# Altium PCB ECS_V1.06.PcbDoc
Units mil, origin at the board's own origin, x right, y up, seen from the top; angles counter-clockwise.
Board outline 5681.51 x 6024.45 mil, 2 copper layers (Component Side, Bottom Layer), stack 12.8 mil thick; 110 components, 106 nets, 425 pads, 494 vias.
Unrouted connection lines stored in the file: 1.
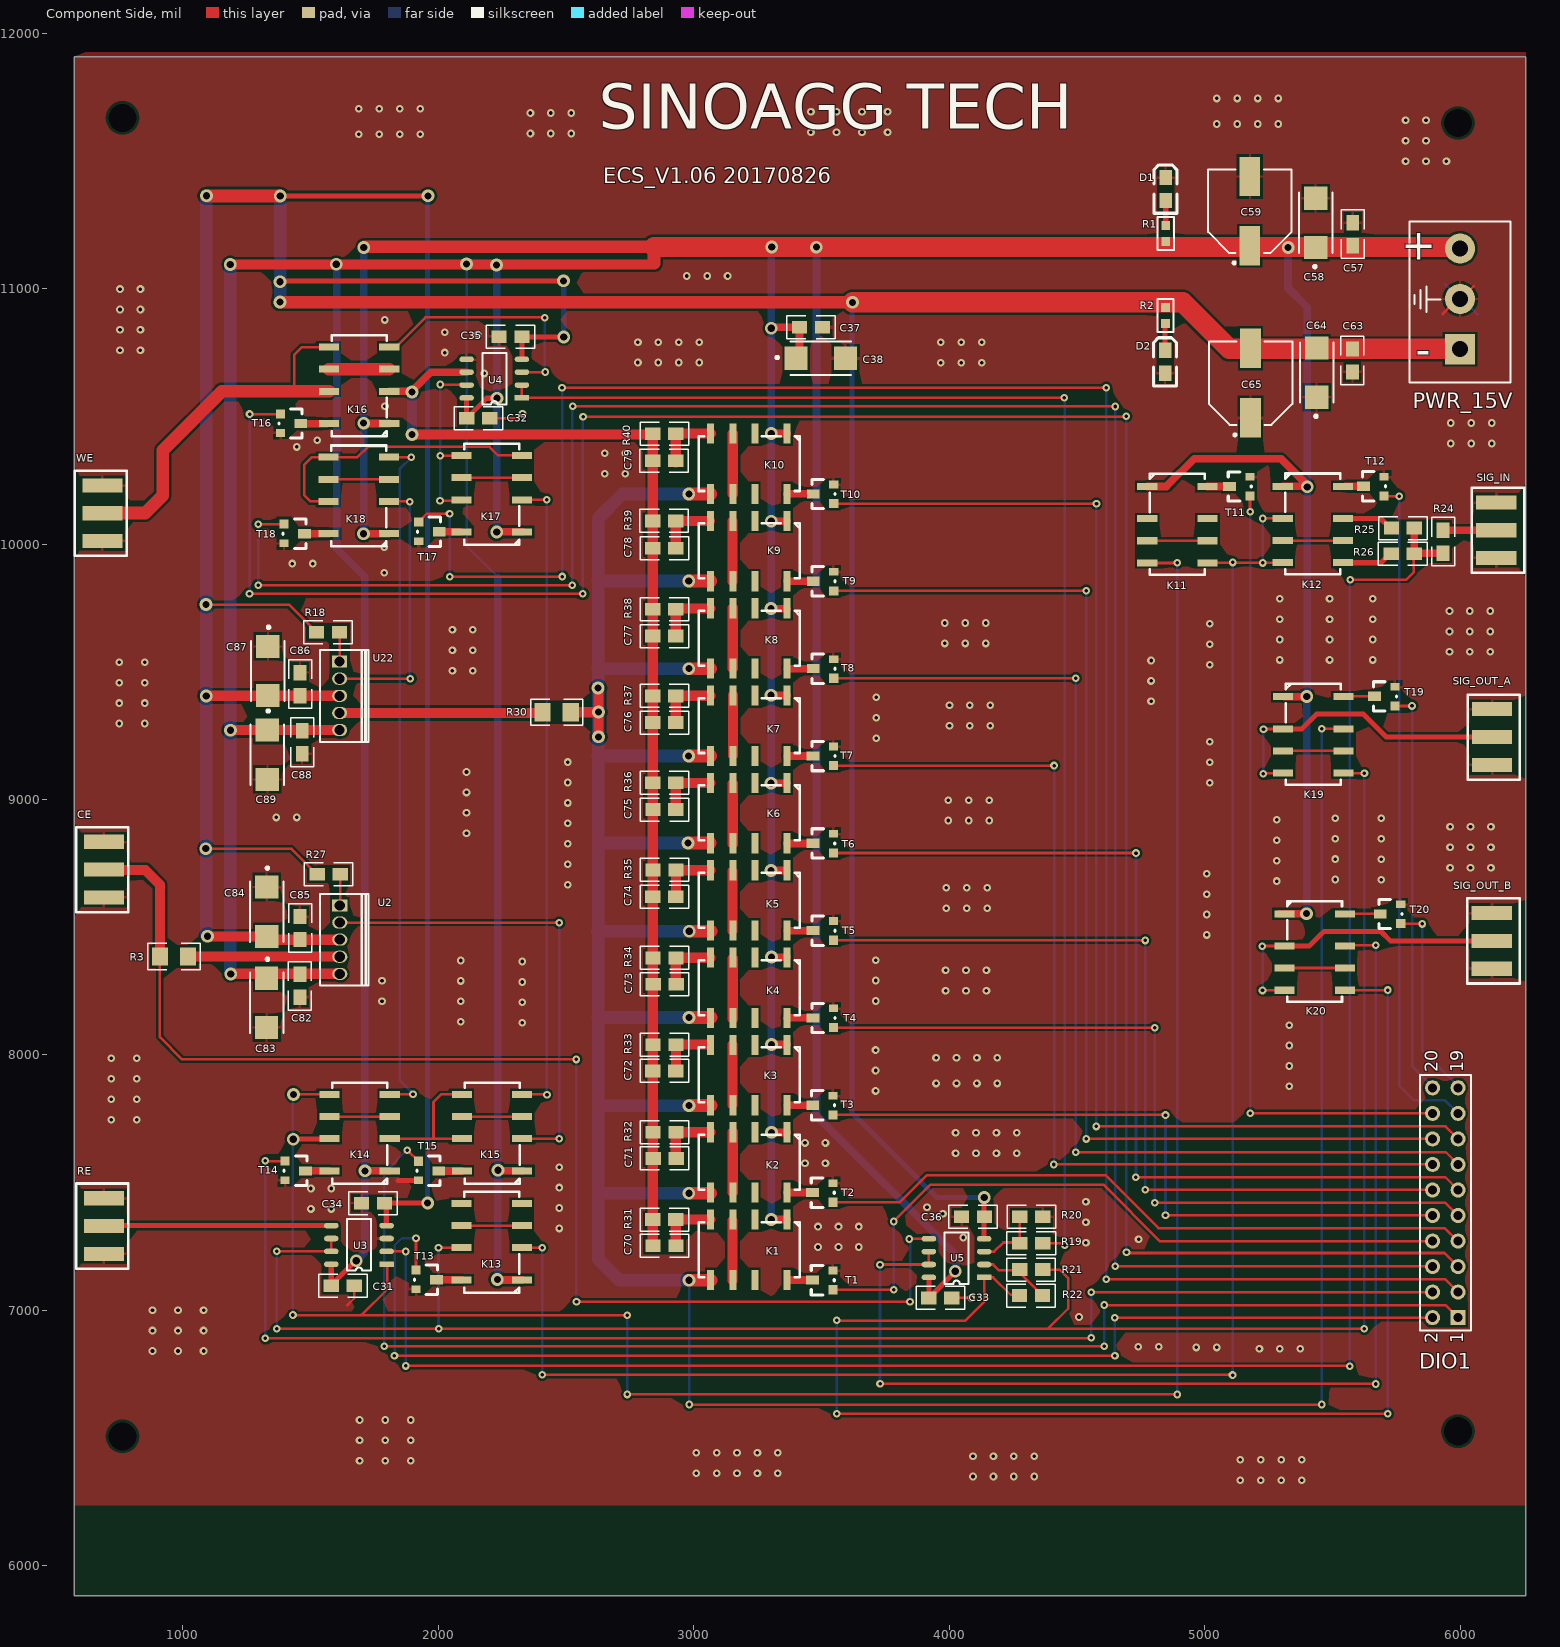
[diagram p0: Component Side view]
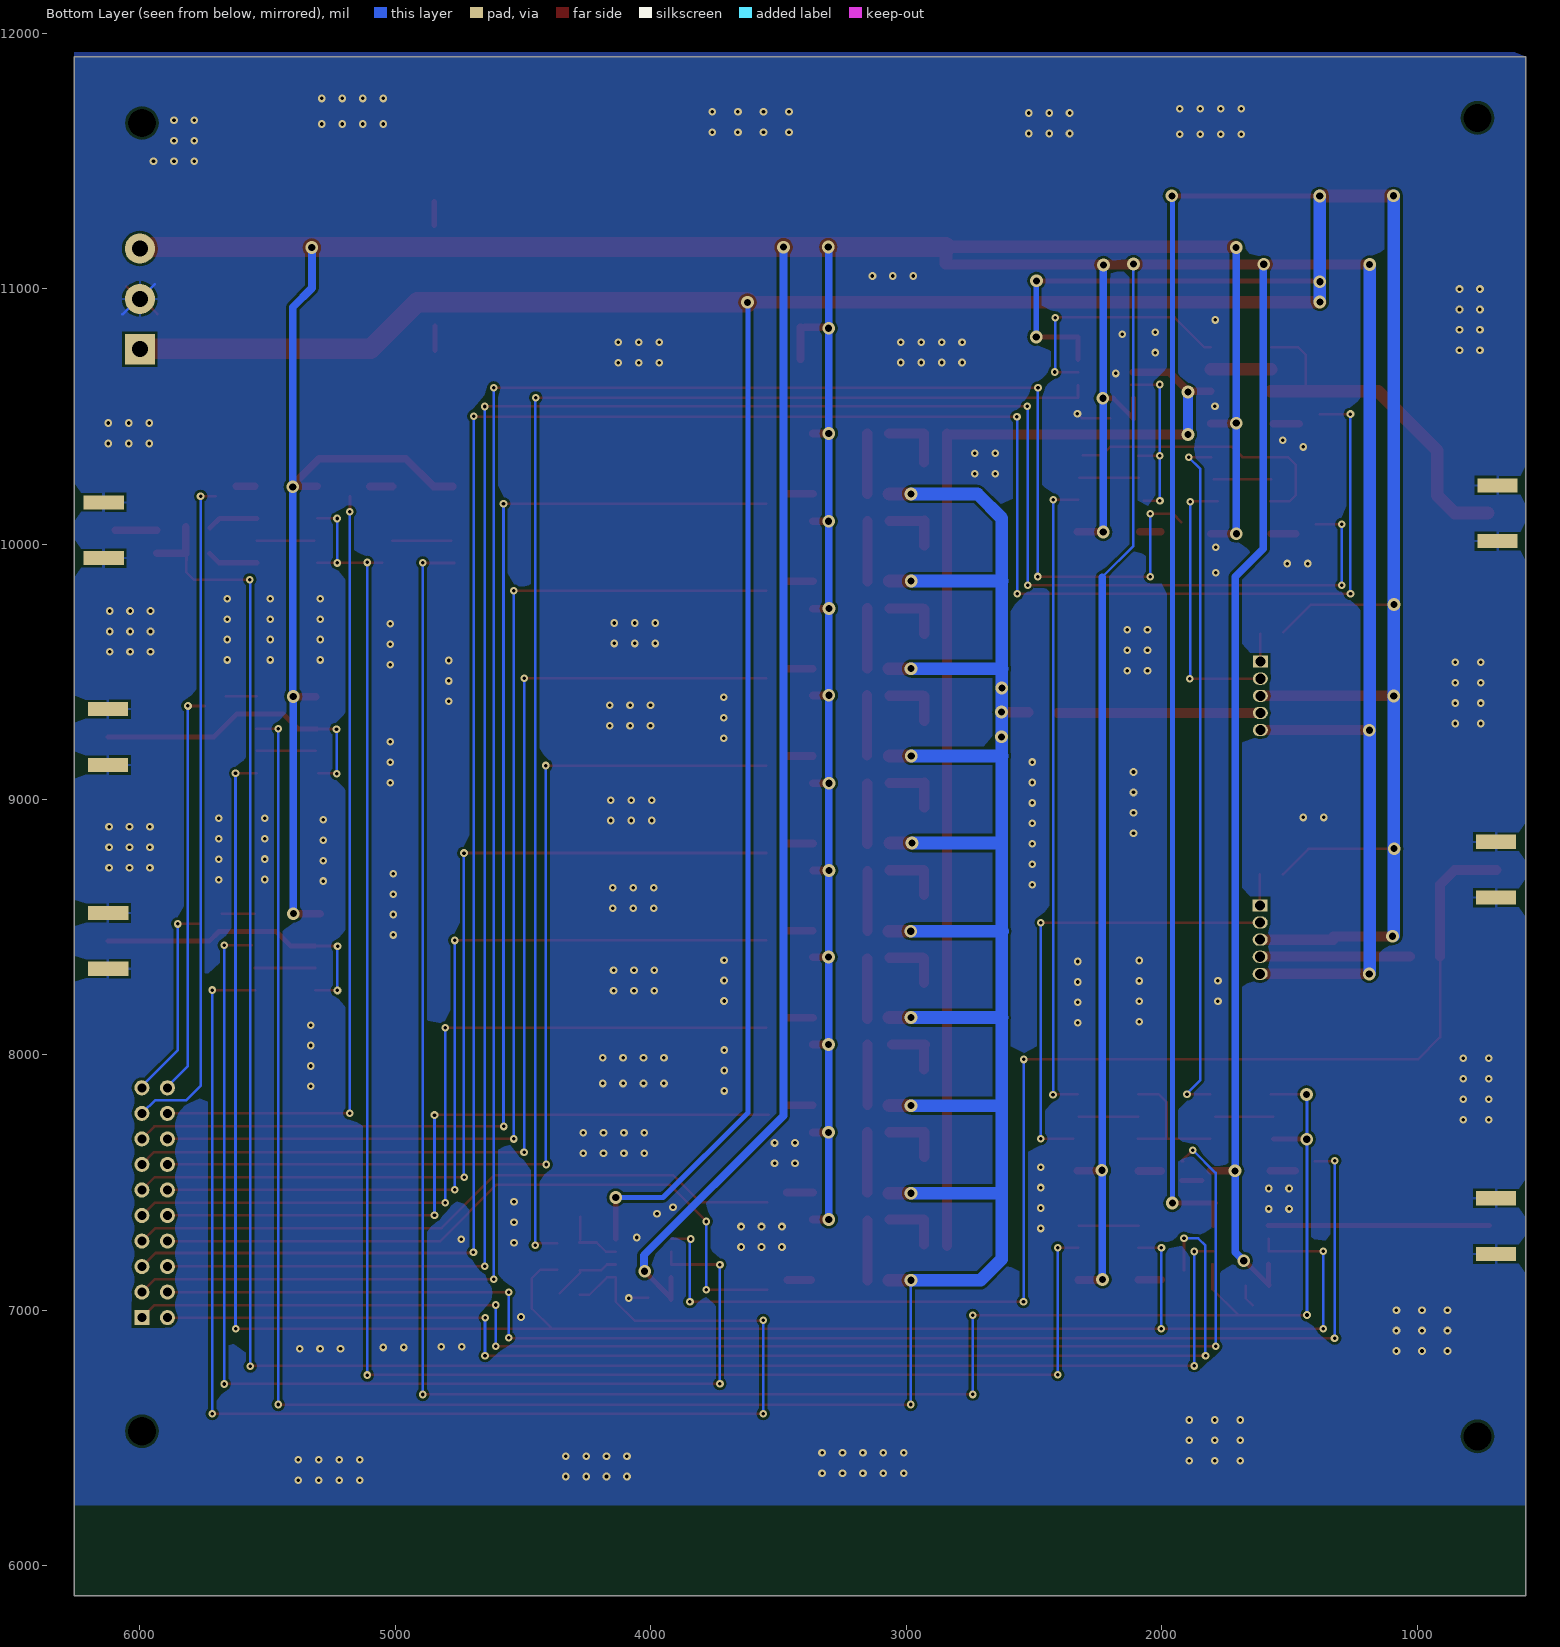
[diagram p1: Bottom Layer view, seen from below]

## Layer stack, top to bottom
Top Solder: solder mask 0.4, Solder Resist, Dk 3.5
Component Side: signal copper 1.4
Dielectric 1: core 10, FR-4, Dk 4.2
Bottom Layer: signal copper 1.4
Solder Side: solder mask 0.4, Solder Resist, Dk 3.5

## Board outline
575.03,5883.03 575.03,11907.48 6256.54,11907.48 6256.54,5883.03

## Design rules (kind name [scope] priority, off if disabled: settings)
Clearance [All] p1: gap=5
ComponentClearance [All] p1: gap=0 collisioncheckmode=3 verticalgap=0 showdistances=FALSE
PolygonConnect PolygonConnect_1 [IsVia] p1: connectstyle=Direct reliefconductorwidth=10 reliefentries=4 polygonreliefangle="90 Angle" airgapwidth=10
PolygonConnect PolygonConnect_2 [All] p2: connectstyle=Relief reliefconductorwidth=10 reliefentries=4 polygonreliefangle="90 Angle" airgapwidth=10
RoutingVias [All] p1: holewidth=28 width=50 viastyle="Through Hole" minholewidth=28 minwidth=50 maxholewidth=28 maxwidth=50
SolderMaskExpansion [All] p1: expansion=4
Width [All] p1: maxlimit=100 minlimit=10 preferedwidth=10 minimp=50.000000 maximp=50.000000 favimp=50.000000
29 further rules are at their usual default settings.

## Components (designator, comment, footprint, x,y, rotation, side; value= is the part's Value field where it differs from the comment)
C31 "100nF" 0805 1581.12,7096.82 r0 top
C32 "100nF" 0805 2111.62,10492.81 r0 top
C33 "100nF" 0805 3920.34,7048.66 r0 top
C34 "100nF" 0805 1789.33,7419.73 r180 top
C35 "100nF" 0805 2327.67,10811.61 r180 top
C36 "100nF" 0805 4138.47,7366.24 r180 top
C37 "Cap" 0805 3413.98,10848.52 r0 top
C38 "Cap Pol1" 6032_pol 3496.36,10727.17 r0 top
C57 "100nF" 0805 5579.83,11167.9 r90 top
C58 "10uF,50V" 6032_pol 5434.67,11256.17 r90 top
C59 "47uF,50V" cap_pol_8*10.2 5176.68,11303.03 r90 top
C63 "100nF" 0805 5578.46,10673.58 r90 top
C64 "10uF,50V" 6032_pol 5438.7,10670.2 r90 top
C65 "47uF,50V" cap_pol_8*10.2 5179.65,10629.85 r90 top
C70 "Cap" 0805 2930.28,7252.96 r180 top
C71 "Cap" 0805 2930.95,7594.95 r180 top
C72 "Cap" 0805 2930.17,7937.44 r180 top
C73 "Cap" 0805 2930.97,8276.79 r180 top
C74 "Cap" 0805 2929.98,8619.37 r180 top
C75 "Cap" 0805 2930.23,8960.45 r180 top
C76 "Cap" 0805 2929.87,9301.35 r180 top
C77 "Cap" 0805 2929.65,9639.67 r180 top
C78 "Cap" 0805 2929.87,9983.9 r180 top
C79 "Cap" 0805 2929.36,10326.44 r180 top
C82 "100nF" 0805 1458.4,8315.76 r270 top
C83 "10uF" 6032_pol 1328.23,8204.64 r270 top
C84 "100nF" 0805 1458.9,8542.08 r270 top
C85 "10uF" 6032_pol 1328.3,8561.56 r270 top
C86 "100nF" 0805 1458.9,9496.72 r270 top
C87 "10uF" 6032_pol 1332.6,9504.06 r270 top
C88 "100nF" 0805 1467.13,9269.02 r270 top
C89 "10uF" 6032_pol 1330.75,9176.3 r270 top
CE "SMA" SMA_SMT 691.1,8728.92 r90 top
D1 "LED3" 0805_pol1 4836.58,11385.74 r270 top
D2 "LED3" 0805_pol1 4834.49,10709.03 r270 top
DIO1 "Header 10X2" HDR2X10 5992.27,6971.47 r90 top
K1 "AXICOM IM" AXICOM_IM06 3240.5,7230.66 r180 top
K2 "AXICOM IM" AXICOM_IM06 3240.5,7572.54 r180 top
K3 "AXICOM IM" AXICOM_IM06 3240.5,7914.42 r180 top
K4 "AXICOM IM" AXICOM_IM06 3240.5,8256.31 r180 top
K5 "AXICOM IM" AXICOM_IM06 3240.5,8598.19 r180 top
K6 "AXICOM IM" AXICOM_IM06 3240.5,8940.07 r180 top
K7 "AXICOM IM" AXICOM_IM06 3240.5,9281.95 r180 top
K8 "AXICOM IM" AXICOM_IM06 3240.5,9623.83 r180 top
K9 "AXICOM IM" AXICOM_IM06 3240.5,9965.71 r180 top
K10 "AXICOM IM" AXICOM_IM06 3240.5,10307.59 r180 top
K11 "AXICOM IM" AXICOM_IM06 4900.09,10100.44 r270 top
K12 "AXICOM IM" AXICOM_IM06 5430.85,10101.09 r270 top
K13 "AXICOM IM" AXICOM_IM06 2202.11,7244.4 r90 top
K14 "AXICOM IM" AXICOM_IM06 1685.03,7671.14 r90 top
K15 "AXICOM IM" AXICOM_IM06 2203.38,7671.14 r90 top
K16 "AXICOM IM" AXICOM_IM06 1682.97,10596.78 r90 top
K17 "AXICOM IM" AXICOM_IM06 2202.13,10171.99 r90 top
K18 "AXICOM IM" AXICOM_IM06 1681.76,10165.66 r90 top
K19 "AXICOM IM" AXICOM_IM06 5432.18,9277.65 r270 top
K20 "AXICOM IM" AXICOM_IM06 5437.68,8427.53 r270 top
PWR_15V "Header 3" PWR_3T 6000.11,10762.79 r180 top
R1 "10K" 0603 4843.39,11276.36 r0 top
R2 "2.2K" 0603 4841.73,10956.12 r0 top
R3 "Res1" 1206 1020.47,8385.31 r180 top
R18 "Res1" 0805 1613.51,9654.91 r180 top
R19 "Res1" 0805 4276.15,7262.69 r0 top
R20 "Res1" 0805 4276.76,7366.72 r0 top
R21 "Res1" 0805 4365.88,7159.69 r180 top
R22 "Res1" 0805 4365.29,7057.83 r180 top
R24 "Res1" 0805 5933.37,9964.28 r90 top
R25 "Res1" 0805 5821.13,10062.63 r180 top
R26 "Res1" 0805 5820.42,9962.33 r180 top
R27 "Res1" 0805 1615.64,8706.92 r180 top
R30 "Res1" 1206 2408.46,9341.59 r0 top
R31 "Res1" 0805 2929.95,7355.55 r180 top
R32 "Res1" 0805 2930.46,7697.25 r180 top
R33 "Res1" 0805 2930.52,8040.26 r180 top
R34 "Res1" 0805 2930.29,8379.98 r180 top
R35 "Res1" 0805 2930.46,8724.33 r180 top
R36 "Res1" 0805 2929.96,9065.38 r180 top
R37 "Res1" 0805 2929.97,9405.33 r180 top
R38 "Res1" 0805 2929.97,9744.74 r180 top
R39 "Res1" 0805 2929.36,10090.28 r180 top
R40 "Res1" 0805 2929.97,10432 r180 top
RE "SMB" SMA_SMT 691.1,7333.49 r90 top
SIG_IN "SMA" SMA_SMT 6141.37,10050.07 r270 top
SIG_OUT_A "SMB" SMA_SMT 6124.69,9240.61 r270 top
SIG_OUT_B "SMB" SMA_SMT 6123.93,8442.86 r270 top
T1 "NUD3112" SOT-23 3424.78,7033.34 r90 top
T2 "NUD3112" SOT-23 3424.73,7375.44 r90 top
T3 "NUD3112" SOT-23 3425.34,7717.28 r90 top
T4 "NUD3112" SOT-23 3427.03,8059.44 r90 top
T5 "NUD3112" SOT-23 3426.98,8401.46 r90 top
T6 "NUD3112" SOT-23 3426.84,8742.71 r90 top
T7 "NUD3112" SOT-23 3427.05,9084.78 r90 top
T8 "NUD3112" SOT-23 3427.47,9426.51 r90 top
T9 "NUD3112" SOT-23 3427.66,9768.8 r90 top
T10 "NUD3112" SOT-23 3427.58,10110.55 r90 top
T11 "NUD3112" SOT-23 5057.15,10140 r90 top
T12 "NUD3112" SOT-23 5581.82,10140.48 r90 top
T13 "NUD3112" SOT-23 2033.04,7205.52 r270 top
T14 "NUD3112" SOT-23 1520.62,7632 r270 top
T15 "NUD3112" SOT-23 2042.33,7631.77 r270 top
T16 "NUD3112" SOT-23 1502.11,10557.08 r270 top
T17 "NUD3112" SOT-23 2043.86,10133.52 r270 top
T18 "NUD3112" SOT-23 1516.68,10125.65 r270 top
T19 "NUD3112" SOT-23 5625.13,9318.18 r90 top
T20 "NUD3112" SOT-23 5647.04,8466.5 r90 top
U2 "BUF634" PSFM-T5 1614.4,8585.14 r0 top
U3 "AD4522-2" SO-8N 1797.71,7180.66 r180 top
U4 "AD4522-2" SO-8N 2327.58,10572.02 r180 top
U5 "AD4522-2" SO-8N 4136.98,7129.28 r180 top
U22 "BUF634" PSFM-T5 1613.75,9539.64 r0 top
WE "SMB" SMA_SMT 685.88,10124.34 r90 top

## Footprints (in the part's own frame and the unit in brackets; to place one, negate y for a bottom-side part, rotate by r counter-clockwise, add the part's x,y. Pads: shape width x height; smd on the part's side, far side on the other; paste and mask are expansions set on the pad)
0603 [mil]
  rect 35x35 smd: 1(4.25,-92.76) 2(4.25,-29.76)
  silkscreen extent -27,-126 36,4
0805 [mil]
  rect 60x50 smd: 1(90,0) 2(0,0)
  silkscreen extent -50,-45 140,45
0805_pol1 [mil]
  rect 60x50 smd: 1(40.87,10.94) 2(-49.13,10.94)
  silkscreen extent -98,-34 91,56
1206 [mm]
  rect 1.6x1.8 smd: 1(0,0) 2(2.8,0)
  silkscreen extent -1.2,-1.3 4,1.3
6032_pol [mm]
  rect 2.3x2.3 smd: 1(-2.425,0) 2(2.475,0)
  silkscreen extent -4.46,-1.65 3.03,1.65
AXICOM_IM06 [mm]
  rect 0.7x2 smd: 1(-3.174,-3.174) 2(0.026,-3.174) 3(2.226,-3.174) 4(4.426,-3.174) 5(4.426,2.826) 6(2.226,2.826) 7(0.026,2.826) 8(-3.174,2.826)
  silkscreen extent -4.44,-2.92 5.59,2.54
cap_pol_8*10.2 [mm]
  rect 3.9x2.05 smd: 1(-3.443,-0.001) 2(3.457,-0.001)
  silkscreen extent -5.27,-4.15 4.16,4.15
HDR2X10 [mm] "Connector; Header; 10x2 Position"
  rect 1.5x1.5 hole 0.9: 1(0,0)
  round 1.5 hole 0.9: 2(0,2.54) 3(2.54,0) 4(2.54,2.54) 5(5.08,0) 6(5.08,2.54) 7(7.62,0) 8(7.62,2.54) 9(10.16,0) 10(10.16,2.54) 11(12.7,0) 12(12.7,2.54) 13(15.24,0) 14(15.24,2.54) 15(17.78,0) 16(17.78,2.54) 17(20.32,0) 18(20.32,2.54) 19(22.86,0) 20(22.86,2.54)
  silkscreen extent -1.27,-1.27 24.13,3.81
PSFM-T5 [mm]
  rect 1.5x1.2 hole 1: 1(0,0)
  oval 1.5x1.2 hole 1: 2(0,-1.7) 3(0,-3.4) 4(0,-5.1) 5(0,-6.8)
  silkscreen extent -1.95,-7.98 2.87,1.16
PWR_3T [mm]
  rect 3x3 hole 1.6: 1(0,0)
  round 3 hole 1.6: 2(0,-5) 3(0,-10)
  silkscreen extent -5,-12.67 5.05,3.3
SMA_SMT [mm]
  rect 1.4x4 smd: 1(-0.095,0) 2(-2.87,0) 2(2.68,0)
  rect 1.4x4 smd far side: 2(-2.87,0) 2(2.68,0)
  silkscreen extent -4.32,-2.42 4.15,2.77
SO-8N [mm]
  rect 1.44x0.55 smd: 1(0,0)
  oval 1.44x0.55 smd: 2(0,-1.28) 3(0,-2.56) 4(0,-3.84) 5(5.5,-3.84) 6(5.5,-2.56) 7(5.5,-1.28) 8(5.5,0)
  silkscreen extent 1.55,-4.48 3.95,0.64
SOT-23 [mil]
  rect 36x36 smd: 1(47.76,-120.28)
  rect 30x36 smd: 2(122.76,-120.28)
  rect 36x50 smd: 3(85.76,-40.28)
  silkscreen extent 28,-125 143,-35

## Part data
C31 C32 C33 C34 C35 C36 C82 C84 C86 C88: library part Cap, "Capacitor"
C37 C70 C71 C72 C73 C74 C75 C76 C77 C78 C79: "Capacitor"
C38: "Polarized Capacitor (Radial)"
C57 C63: library part Cap, "Capacitor,100V"
C58 C59 C64 C65 C83 C85 C87 C89: library part "Cap Pol1", "Polarized Capacitor (Radial)"
CE SIG_IN: library part SMB, "SMB Straight Connector"
D1 D2: "Typical BLUE SiC LED"
DIO1: "Header, 10-Pin, Dual row"
K1 K2 K3 K4 K5 K6 K7 K8 K9 K10 K11 K12 K13 K14 K15 K16 K17 K18 K19 K20: library part "AXiCOM IM05"
PWR_15V: "Header, 3-Pin"
R1 R2: library part Res1, "Resistor"
R3 R18 R19 R20 R21 R22 R24 R25 R26 R27 R30 R31 R32 R33 R34 R35 R36 R37 R38 R39 R40: "Resistor"
RE SIG_OUT_A SIG_OUT_B WE: "SMB Straight Connector"
T1 T2 T3 T4 T5 T6 T7 T8 T9 T10 T11 T12 T13 T14 T15 T16 T17 T18 T19 T20: library part NUD3105, "Relay Driver 5V Supply"
U3 U4 U5: library part AD8676

## Free pads (board coordinates)
  round 50 hole 110: 2(764,6507) 2(764,11668.37) 2(5992.07,6527) 2(5992.07,11648.37)

## Via types
v1: diameter 30, hole 14, Component Side to Bottom Layer, 430 vias
v2: diameter 50, hole 28, Component Side to Bottom Layer, 64 vias

## Nets (pads, with @x,y where several pads share a name; then routed paths per layer and width w, separated by ;. In a path a pad name is that pad's centre, name@x,y a point inside that pad or via, vN(x,y) a via of type N, cw(c..) or ccw(c..) an arc to the next point about the centre after c; other vN are vias at no path point)
+15V: C31.2 C32.2 C33.2 C37.2 C38.1 C57.2 C58.1 C59.1 C82.2 C83.1 C88.2 C89.1 K1.1 K2.1 K3.1 K4.1 K5.1 K6.1 K7.1 K8.1 K9.1 K10.1 K11.1 K12.1 K13.1 K14.1 K15.1 K16.1 K17.1 K18.1 K19.1 K20.1 PWR_15V.3 R1.1 U2.5 U3.8 U4.8 U5.8 U22.5 | length 33535.5
  Component Side w10: C33.2 C33.2@3920.45,7048.76
  Component Side w20: C31.2@1579.8,7098.25 v2@1671.19,7189.65 ; C31.2@1581.17,7106.17 U3.8 ; C32.2@2111.05,10488.91 U4.8 ; C32.2 2189.69,10570.88 v2@2229.94,10570.88 ; C33.2@3920.45,7043.43 C33.2@3920.45,7048.76 ; U5.8 C33.2@3920.45,7048.76 ; v2@4023.95,7152.27 C33.2@3920.45,7048.76
  Component Side w30: v2@1708.2,7546.19 K14.1 ; v2@1708.24,10040.71 K18.1 ; v2@1712.17,10471.83 K16.1 ; v2@2228.3,10047.83 K17.1@2330.18,10047.83 ; v2@2239.08,7119.07 K13.1@2326.72,7119.07 ; v2@2242.06,7546.62 K15.1@2329.69,7546.62 ; v2@3302.28,8721.89 K5.1@3364.58,8721.89 ; v2@3302.85,9063.09 K6.1@3365.14,9063.09 ; v2@3302.86,9747.21 K8.1@3365.16,9747.21 ; v2@3302.92,9407.37 K7.1@3365.22,9407.37 ; v2@3303.16,7355.61 K1.1 ; v2@3303.15,10432.77 K10.1@3365.44,10432.77 ; v2@3303.67,10088.98 K9.1@3365.96,10088.98 ; v2@3304.04,8040.73 K3.1@3366.33,8040.73 ; v2@3304.04,8382.77 K4.1@3366.33,8382.77 ; v2@3304.14,7696.57 K2.1@3366.44,7696.57 ; v2@3311.55,10849.23 C37.2@3396.43,10849.23 ; C38.1@3413.98,10722.74 C37.2 ; K11.1 4850.51,10225.39 4959.26,10334.13 5298.81,10334.13 5401.91,10231.04 v2@5401.91,10226.04 ; K20.1@5293.31,8552.33 v2@5398.79,8552.33 ; K12.1 v2@5393.53,10226.04 ; K19.1@5312.21,9402.36 v2@5399.85,9402.36
  Component Side w40: v2(1185.86,11094.55) 2840.17,11094.55 ; v2@1186.46,8317.42 U2.5 ; v2@1189.57,9271.92 U22.5@1600.19,9271.92
  Component Side w50: v2@1710.69,11163.44 2844.85,11163.44 ; 2844.85,11099.23 2844.85,11163.44 ; 2844.85,11162.86 2844.85,11163.44
  Component Side w80: 2844.85,11162.86 PWR_15V.3@6001.88,11162.86
  Bottom Layer w10: v2@2110.66,11097.84 2110.66,9992.5 2233.16,9870.01
  Bottom Layer w30: v2@1602.22,11099 1602.22,9981.52 1712.53,9871.21 1712.53,7228.13 v2(1678.89,7194.49) ; v2@1707.93,10039.43 v2(1707.93,10473.15) v2@1707.93,11162.69 ; v2(2228.74,10046.62) v2@2228.74,11095.42 ; v2@2233.16,7116.07 2233.16,9870.01 ; v2(3303.16,7356.03) v2@3303.16,11161.76 ; v2@3480.54,11163.55 3480.54,7761.53 4026.86,7215.21 v2@4026.86,7148.88 ; v2@5326.17,11158.48 5326.17,11002.33 5401.34,10927.17 v2@5401.34,9408.56 ; v2@5399.55,8555.56 v2(5399.55,9403.65)
  Bottom Layer w50: v2@1185.3,8319.55 v2@1185.3,11084.71
  other v2: 2231.28,7121.3 4023.95,7152.98 1713.07,7546.3 2234.25,7548.85 3304.14,7696.99 3304.04,8041.15 1187.38,8317.07 3304.04,8383.19 5399.16,8553.16 3302.28,8722.31 3302.85,9063.51 1187.12,9270.87 3302.92,9407.78 3302.86,9747.63 1707.71,10040.32 3303.67,10089.4 5401.34,10223.81 3303.15,10433.19 2230.37,10570.45 3303.69,10844.86 2227.85,11092.55 1600.79,11095.12 2110.65,11095.81 1708.5,11161.18 5326.92,11160.74 3479.98,11162.09 3305.4,11162.62
-15V: C34.2 C35.2 C36.2 C63.1 C64.2 C65.2 C84.1 C85.2 C86.1 C87.2 PWR_15V.1 R2.2 R18.1 R27.1 U2.3 U3.4 U4.4 U5.4 U22.3 | length 20630.9
  Component Side w10: v2@1091.95,9763.11 1415.31,9763.11 R18.1 ; v2@1092.52,8806.81 1425.76,8806.81 R27.1 ; C35.2@2327.58,10810.56 C35.2@2328.14,10811.12
  Component Side w20: v2(1381.17,11362.91) v2(1960.19,11362.92) ; v2@1392.8,11030.18 v2(2490.46,11030.18) ; C34.2 v2@1955.25,7419.73 ; U3.4 C34.2@1797.71,7411.94 ; U4.4 C35.2@2327.58,10810.56 ; C35.2@2328.14,10811.12 v2@2499.17,10811.12 ; U5.4 v2@4136.98,7453.82
  Component Side w40: v2@1089.1,9405.78 U22.3 ; v2@1094.7,8464.1 C85.2 ; C85.2@1328.3,8451.28 U2.3
  Component Side w50: v2@1094.96,11362.91 v2(1381.17,11362.91) ; v2@1379.15,10946.09 v2(3621.37,10946.09)
  Component Side w80: v2(3621.37,10946.09) 4913.92,10946.09 5096.1,10763.91 PWR_15V.1@6000.54,10763.91
  Bottom Layer w20: v2(1958.38,7420.28) v2@1958.38,11357.65 ; v2(2491.02,10810.93) v2@2491.02,11034.73 ; v2@3620.16,10948.68 3620.16,7773.13 3951.73,7441.56 v2(4137.13,7441.56)
  Bottom Layer w50: v2@1091.76,8467.67 v2(1091.76,9405.46) v2@1091.76,11363.25 ; v2@1381.17,10952.12 v2(1381.17,11362.91)
  other v2: 1096.53,8464.93 1090.03,8807.48 1090.9,9762.77 1380.88,10947.81 1380.89,11026.5 1092.5,11363.19
AGND: C31.1 C32.1 C33.1 C34.1 C35.1 C36.1 C37.1 C38.2 C57.1 C58.2 C59.2 C63.2 C64.1 C65.1 C82.1 C83.2 C84.2 C85.1 C86.2 C87.1 C88.1 C89.2 CE.2 D1.2 D2.1 PWR_15V.2 R20.1 RE.2 SIG_IN.2 SIG_OUT_A.2 SIG_OUT_B.2 T1.2 T2.2 T3.2 T4.2 T5.2 T6.2 T7.2 T8.2 T9.2 T10.2 T11.2 T12.2 T13.2 T14.2 T15.2 T16.2 T17.2 T18.2 T19.2 T20.2 U3.3 U4.5 WE.2 | length 717.3
  Component Side w10: 1644.06,7020.6 1671.12,7047.65 C31.1 ; C32.1 2312.51,10492.81 v1@2329.33,10509.63 ; C33.1 v1@4083.82,7048.66 ; 5931.29,10899.96 5990.97,10959.64 PWR_15V.2 6003.18,10959.64 6053.4,11009.86
  Component Side w20: 1842.85,7509.01 T15.2
  Bottom Layer w10: 5942.05,11016.55 5998.96,10959.64 PWR_15V.2 6007.68,10959.64 6068.23,10899.09
  other v1: 5139.89,6335.28 5219.89,6335.28 5299.89,6335.28 5379.89,6335.28 4093.26,6349.67 4173.26,6349.67 4253.26,6349.67 4333.26,6349.67 3009.44,6362.14 3089.44,6362.14 3169.44,6362.14 3249.44,6362.14 3329.44,6362.14 1691.9,6411.1 1791.9,6411.1 1891.9,6411.1 5139.89,6415.28 5219.89,6415.28 5299.89,6415.28 5379.89,6415.28 4093.26,6429.67 4173.26,6429.67 4253.26,6429.67 4333.26,6429.67 3009.44,6442.14 3089.44,6442.14 3169.44,6442.14 3249.44,6442.14 3329.44,6442.14 1691.9,6491.1 1791.9,6491.1 1891.9,6491.1 1691.9,6571.1 1791.9,6571.1 1891.9,6571.1 881.16,6841.12 981.16,6841.12 1081.16,6841.12 5214.55,6850.12 5294.55,6850.12 5374.55,6850.12 4967.16,6854.99 5047.16,6854.99 4739.82,6857.2 4819.82,6857.2 881.16,6921.12 981.16,6921.12 1081.16,6921.12 4508.07,6974.09 881.16,7001.12 981.16,7001.12 1081.16,7001.12 4086.32,7048.27 3486.54,7248.14 3566.54,7248.14 3646.54,7248.14 4535.35,7265.47 4741.27,7279.05 4054.58,7285.32 2473.99,7320.84 3486.54,7328.14 3566.54,7328.14 3646.54,7328.14 4535.35,7345.47 3975.59,7377.85 1501.47,7397.25 1581.47,7397.25 2473.99,7400.84 3913.06,7404.35 4535.35,7425.47 1501.47,7477.25 1581.47,7477.25 2473.99,7480.84 2473.99,7560.84 3435.52,7575.47 3515.52,7575.47 4025,7615.17 4105,7615.17 4185,7615.17 4265,7615.17 3435.52,7655.47 3515.52,7655.47 4025,7695.17 4105,7695.17 4185,7695.17 4265,7695.17 720,7746.88 820,7746.88 720,7826.88 820,7826.88 3711.81,7859.13 5330.79,7876.84 3948.54,7888.45 4028.54,7888.45 4108.54,7888.45 4188.54,7888.45 720,7906.88 820,7906.88 3711.81,7939.13 5330.79,7956.84 720,7986.88 820,7986.88 3948.54,7988.45 4028.54,7988.45 4108.54,7988.45 4188.54,7988.45 3711.81,8019.13 5330.79,8036.84 5330.79,8116.84 2329.11,8125.69 2087.82,8129.64 2329.11,8205.69 1779.84,8210.35 2087.82,8209.64 3713.15,8211.28 3985.78,8251.95 4065.78,8251.95 4145.78,8251.95 2329.11,8285.69 1779.84,8290.35 2087.82,8289.64 3713.15,8291.28 3985.78,8331.95 4065.78,8331.95 4145.78,8331.95 2329.11,8365.69 2087.82,8369.64 3713.15,8371.28 5008.01,8469.68 5008.01,8549.68 3988.63,8574.63 4068.63,8574.63 4148.63,8574.63 5008.01,8629.68 3988.63,8654.63 4068.63,8654.63 4148.63,8654.63 2507.01,8666.51 5282.45,8680.72 5691.8,8686.44 5511.5,8686.72 5008.01,8709.68 5960.62,8732.97 6040.62,8732.97 6120.62,8732.97 2507.01,8746.51 5282.45,8760.72 5691.8,8766.44 5511.5,8766.72 5960.62,8812.97 6040.62,8812.97 6120.62,8812.97 2507.01,8826.51 5282.45,8840.72 5691.8,8846.44 5511.5,8846.72 2110.36,8867.55 5960.62,8892.97 6040.62,8892.97 6120.62,8892.97 2507.01,8906.51 3996.4,8917.62 4076.4,8917.62 4156.4,8917.62 5282.45,8920.72 5691.8,8926.44 5511.5,8926.72 1365.32,8929.68 1445.32,8929.68 2110.36,8947.55 2507.01,8986.51 3996.4,8997.62 4076.4,8997.62 4156.4,8997.62 2110.36,9027.55 5020.19,9066.17 2507.01,9066.51 2110.36,9107.55 5020.19,9146.17 2507.01,9146.51 5020.19,9226.17 3714.92,9240.11 4001.1,9288.27 4081.1,9288.27 4161.1,9288.27 751.15,9297.47 851.15,9297.47 3714.92,9320.11 4001.1,9368.27 4081.1,9368.27 4161.1,9368.27 751.15,9377.47 851.15,9377.47 4790.26,9384.09 3714.92,9400.11 751.15,9457.47 851.15,9457.47 4790.26,9464.09 2055.48,9504.19 2135.48,9504.19 5019.85,9527.39 751.15,9537.47 851.15,9537.47 4790.26,9544.09 5294.48,9546.2 5489.03,9546.2 5657.82,9546.2 5958.34,9577.7 6038.34,9577.7 6118.34,9577.7 2055.48,9584.19 2135.48,9584.19 5019.85,9607.39 3982.56,9610.88 4062.56,9610.88 4142.56,9610.88 5294.48,9626.2 5489.03,9626.2 5657.82,9626.2 5958.34,9657.7 6038.34,9657.7 6118.34,9657.7 2055.48,9664.19 2135.48,9664.19 5019.85,9687.39 3982.56,9690.88 4062.56,9690.88 4142.56,9690.88 5294.48,9706.2 5489.03,9706.2 5657.82,9706.2 5958.34,9737.7 6038.34,9737.7 6118.34,9737.7 5294.48,9786.2 5489.03,9786.2 5657.82,9786.2 1788.34,9887.16 1428.38,9923.5 1508.38,9923.5 1788.34,9987.16 2652.15,10275.46 2732.15,10275.46 2652.15,10355.46 2732.15,10355.46 1445.91,10379.99 5963.41,10393.64 6043.41,10393.64 6123.41,10393.64 1526.3,10406.16 5963.41,10473.64 6043.41,10473.64 6123.41,10473.64 2329.77,10509.38 1791.49,10539.29 2179.41,10667.79 3967.5,10710.24 4047.5,10710.24 4127.5,10710.24 2781.55,10710.53 2861.55,10710.53 2941.55,10710.53 3021.55,10710.53 2024.76,10749.58 754.15,10758.16 834.15,10758.16 3967.5,10790.24 4047.5,10790.24 4127.5,10790.24 2781.55,10790.53 2861.55,10790.53 2941.55,10790.53 3021.55,10790.53 2154.7,10820.76 2024.76,10829.58 754.15,10838.16 834.15,10838.16 1790.89,10877.24 754.15,10918.16 834.15,10918.16 754.15,10998.16 834.15,10998.16 2972.36,11049.35 3052.36,11049.35 3132.36,11049.35 5786.49,11498.64 5866.49,11498.64 5946.49,11498.64 5786.49,11578.64 5866.49,11578.64 1688.93,11603.78 1768.93,11603.78 1848.93,11603.78 1928.93,11603.78 2360.69,11607.16 2440.69,11607.16 2520.69,11607.16 3458.8,11612.26 3558.8,11612.26 3658.8,11612.26 3758.8,11612.26 5047.58,11644.32 5127.58,11644.32 5207.58,11644.32 5287.58,11644.32 5786.49,11658.64 5866.49,11658.64 2360.69,11687.16 2440.69,11687.16 2520.69,11687.16 3458.8,11692.26 3558.8,11692.26 3658.8,11692.26 3758.8,11692.26 1688.93,11703.78 1768.93,11703.78 1848.93,11703.78 1928.93,11703.78 5047.58,11744.32 5127.58,11744.32 5207.58,11744.32 5287.58,11744.32
CE: CE.1 R3.2 U5.5 | length 5085.4
  Component Side w10: R3.2 910.23,8069.81 997.56,7982.49 v1@2535.21,7982.49 ; v1(2541.1,7033.86) v1@3845.08,7033.86 ; v1@3843.42,7280.46 U5.5
  Component Side w40: CE.1@690.29,8724.15 853.1,8724.15 910.23,8667.01 R3.2
  Bottom Layer w10: v1@2540.5,7029.92 v1(2540.5,7982.36) ; v1@3843.62,7282.46 3846.68,7279.39 3846.15,7278.85 3846.68,7278.32 v1(3846.68,7034.21)
  other v1: 3843.8,7279.41
D1: K1.8 T1.3 | length 93.8
  Component Side w30: K1.8@3371.3,7119.09 T1.3
D2: K2.8 T2.3 | length 102.7
  Component Side w30: K2.8@3364.96,7461.52 T2.3@3467.65,7461.52
D3: K3.8 T3.3 | length 102.7
  Component Side w30: K3.8@3365.86,7802.68 T3.3@3468.55,7802.68
D4: K4.8 T4.3 | length 102.7
  Component Side w30: K4.8@3364.96,8145.34 T4.3@3467.65,8145.34
D5: K5.8 T5.3 | length 102.7
  Component Side w30: K5.8@3365.56,8486.5 T5.3@3468.25,8486.5
D6: K6.8 T6.3 | length 102.7
  Component Side w30: K6.8@3364.96,8827.96 T6.3@3467.65,8827.96
D7: K7.8 T7.3 | length 102.7
  Component Side w30: K7.8@3365.86,9170.32 T7.3@3468.55,9170.32
D8: K8.8 T8.3 | length 102.7
  Component Side w30: K8.8@3365.86,9512.08 T8.3@3468.55,9512.08
D9: K9.8 T9.3 | length 102.7
  Component Side w30: K9.8@3365.26,9854.44 T9.3@3467.95,9854.44
D10: K10.8 T10.3 | length 102.7
  Component Side w30: K10.8@3365.17,10196.31 T10.3
D11: K11.8 T11.3 | length 87.6
  Component Side w30: K11.8 T11.3@5098.91,10225.39
D12: K12.8 T12.3 | length 70.8
  Component Side w30: K12.8@5551.29,10226.23 T12.3
D13: K13.8 T13.3 | length 88.4
  Component Side w30: T13.3@2002.47,7119.44 K13.8
D14: K14.8 T14.3 | length 95.8
  Component Side w30: T14.3@1477.97,7546.19 K14.8
D15: K15.8 T15.3 | length 89
  Component Side w30: T15.3 K15.8@2091.09,7546.01
D16: K16.8 T16.3 | length 100.5
  Component Side w30: T16.3 K16.8@1562.33,10471.33
D17: K17.8 T17.3 | length 81.6
  Component Side w30: T17.3 K17.8@2085.23,10047.76
D18: K18.8 T18.3 | length 94.4
  Component Side w30: T18.3@1476.11,10040.71 K18.8
D19: K19.8 T19.3 | length 122
  Component Side w10: K19.8@5542.36,9403.99 T19.3@5664.35,9403.99
D20: K20.8 T20.3 | length 129.3
  Component Side w10: K20.8@5549.51,8553.04 T20.3@5678.86,8553.04
FB_R_T1: C70.1 C71.1 C72.1 C73.1 C74.1 C75.1 C76.1 C77.1 C78.1 C79.1 K16.2 R31.1 R32.1 R33.1 R34.1 R35.1 R36.1 R37.1 R38.1 R39.1 R40.1 U4.6 | length 4611.5
  Component Side w30: K16.2 1895.59,10597.82 1969.97,10672.19 U4.6@2111.62,10672.19
  Component Side w40: v2(1897.44,10429.27) R40.1@2829.66,10429.27 ; C70.1@2839.97,7253.15 R40.1
  Bottom Layer w40: v2(1897.44,10429.27) v2(1897.44,10595.23)
FB_R_T2: K1.5 K2.5 K3.5 K4.5 K5.5 K6.5 K7.5 K8.5 K9.5 K10.5 K19.7 R30.2 | length 13381.1
  Component Side w10: v2@2627.19,9341.09 v2(2627.19,9341.99) ; v1(2981.86,6631.53) v1@5458.34,6631.53 ; v1@5458.14,9276.61 K19.7
  Component Side w40: R30.2@2521.59,9341.09 2627.19,9341.09 v2@2627.19,9242.42 ; v2(2627.19,9341.99) v2@2627.19,9436.63
  Component Side w50: v2@2977.32,8829.75 K6.5@3063.44,8829.75 ; v2@2980.13,9170.68 K7.5 ; v2@2980.68,9854.97 K9.5@3066.79,9854.97 ; v2(2980.86,9512.11) K8.5@3066.97,9512.14 ; v2@2980.88,7458.76 K2.5@3066.99,7458.76 ; v2(2980.9,10196.28) K10.5@3067.01,10196.32 ; v2(2981.11,8146.21) K4.5@3067.22,8146.25 ; v2(2981.33,7801.57) K3.5@3067.44,7801.6 ; v2(2981.57,7117.87) K1.5@3067.68,7117.9 ; v2(2982.27,8484.09) K5.5@3068.38,8484.13
  Bottom Layer w10: v1@2981.57,6632.59 v2(2981.57,7117.87) ; v1@5458.12,6632.11 v1(5458.12,9277.15)
  Bottom Layer w50: 2622.09,8484.09 v2(2982.27,8484.09) ; 2623.93,9170.64 v2(2980.13,9170.64) ; 2623.93,9512.11 v2(2980.86,9512.11) ; 2624.46,9854.94 v2(2980.68,9854.94) ; 2624.84,8146.21 v2(2981.11,8146.21) ; 2625.78,8829.71 v2(2977.32,8829.71) ; 2626.22,7458.73 v2(2980.88,7458.73) ; 2629.01,7801.57 v2(2981.33,7801.57) ; v2(2980.9,10196.28) 2721.31,10196.28 2626.27,10101.24 2626.27,7201.33 2709.73,7117.87 v2(2981.57,7117.87)
  other v1: 5457.76,6631.68
  other v2: 2627.34,9245.25 2625.73,9436.02
NetC70_2: C70.2 K1.4 R31.2 | length 227
  Component Side w40: C70.2@2929.95,7258.04 R31.2 ; R31.2@2936.45,7355.29 K1.4@3065.9,7355.29
NetC71_2: C71.2 K2.4 R32.2 | length 227
  Component Side w40: C71.2@2929.29,7599.99 R32.2@2929.29,7697.5 ; R32.2@2936.36,7697.19 K2.4@3065.8,7697.19
NetC72_2: C72.2 K3.4 R33.2 | length 227
  Component Side w40: R33.2@2926.47,8040.34 K3.4@3055.92,8040.34 ; C72.2@2930.19,7943.73 R33.2@2930.19,8041.25
NetC73_2: C73.2 K4.4 R34.2 | length 227
  Component Side w40: C73.2@2929.95,8281.54 R34.2@2929.95,8379.06 ; R34.2@2935.77,8380.55 K4.4@3065.22,8380.55
NetC74_2: C74.2 K5.4 R35.2 | length 227
  Component Side w40: C74.2@2930.33,8626.9 R35.2@2930.33,8724.42 ; R35.2@2936.16,8722.63 K5.4@3065.6,8722.63
NetC75_2: C75.2 K6.4 R36.2 | length 227
  Component Side w40: C75.2@2929.8,8968.51 R36.2@2929.8,9066.03 ; R36.2@2936.57,9064.86 K6.4@3066.02,9064.86
NetC76_2: C76.2 K7.4 R37.2 | length 227
  Component Side w40: C76.2@2929.59,9307.89 R37.2@2929.59,9405.41 ; R37.2@2935.78,9406.18 K7.4@3065.23,9406.18
NetC77_2: C77.2 K8.4 R38.2 | length 227
  Component Side w40: C77.2@2929.55,9647.28 R38.2@2929.55,9744.8 ; R38.2@2935.08,9748.03 K8.4@3064.53,9748.03
NetC78_2: C78.2 K9.4 R39.2 | length 227
  Component Side w40: C78.2@2929.66,9993.85 R39.2@2929.66,10091.36 ; R39.2@2934.73,10090.37 K9.4@3064.17,10090.37
NetC79_2: C79.2 K10.4 R40.2 | length 241.1
  Component Side w40: C79.2@2929.97,10320.33 R40.2 ; R40.2@2936.8,10432.54 K10.4
NetD1_1: D1.1 R1.2 | length 93.5
  Component Side w20: R1.2 D1.1@4847.64,11340.05
NetD2_2: D2.2 R2.1 | length 95.5
  Component Side w20: D2.2 R2.1@4845.43,10853.67
NetK1_3: K1.3 K1.6 | length 235.7
  Component Side w40: K1.6@3152.1,7116.6 K1.3@3152.1,7352.33
NetK2_3: K2.3 K2.6 | length 235.7
  Component Side w40: K2.6@3152.79,7462.29 K2.3@3152.79,7698.02
NetK3_3: K3.3 K3.6 | length 235.7
  Component Side w40: K3.6@3152.1,7803.82 K3.3@3152.1,8039.54
NetK4_3: K4.3 K4.6 | length 235.7
  Component Side w40: K4.6@3152.79,8141.18 K4.3@3152.79,8376.9
NetK5_3: K5.3 K5.6 | length 235.7
  Component Side w40: K5.6@3151.4,8484.78 K5.3@3151.4,8720.51
NetK6_3: K6.3 K6.6 | length 235.7
  Component Side w40: K6.6@3152.79,8827 K6.3@3152.79,9062.73
NetK7_3: K7.3 K7.6 | length 235.7
  Component Side w40: K7.6@3153.48,9172 K7.3@3153.48,9407.72
NetK8_3: K8.3 K8.6 | length 235.7
  Component Side w40: K8.6@3153.02,9512.83 K8.3@3153.02,9748.55
NetK9_3: K9.3 K9.6 | length 235.7
  Component Side w40: K9.6@3151.75,9854.17 K9.3@3151.75,10089.89
NetK10_3: K10.3 K10.6 | length 235.7
  Component Side w40: K10.6@3152.86,10196.82 K10.3
NetK11_3: K11.3 K11.6 | length 230.9
  Component Side w10: K11.3@4780.46,10012.79 K11.6
NetK11_4: K11.4 K14.5 K14.7 U3.1 | length 8549
  Component Side w10: v2@1429.42,7845.4 K14.5 ; v1@1434.57,6982.78 1429.65,6982.78 1428.58,6981.71 1698.37,6981.71 1698.66,6981.99 ; U3.1@1801.02,7180.96 1801.02,7082.85 1699.79,6981.62 v1@2738.02,6981.62 ; v1(2739.65,6670.99) v1@4892.33,6670.99 ; K11.4@4770.16,9925.73 v1@4894.76,9925.73
  Component Side w20: v2@1420.83,7671.67 K14.7@1562.72,7671.67
  Bottom Layer w10: v1(1431.1,6981.92) 1431.1,7845.7 v2@1431.54,7846.14 ; v1@2740.02,6671.91 v1(2740.02,6981.5) ; v1@4892.62,6670.95 v1(4892.62,9926.27)
  other v1: 4892.36,6670.72
  other v2: 1432.39,7670.1 1432.86,7845.4
NetK11_5: K11.5 K12.2 K12.4 K13.2 | length 6950.1
  Component Side w10: K13.2 v1@2401.74,7245.43 ; v1(2407.27,6747.77) v1@5111.23,6747.77 ; K11.5@5050.49,9926.83 K12.4 ; v1@5229.5,10100.05 K12.2
  Bottom Layer w10: v1@2406.79,6748.59 v1(2406.79,7245.44) ; v1@5110.36,6749.95 v1(5110.36,9927.94) ; v1(5226.8,9926.04) v1@5226.8,10090.85
  other v1: 5109.24,6746.87 5228.09,10099.86
NetK12_3: K12.3 K12.6 | length 224
  Component Side w10: K12.3@5318.12,10013.44 K12.6
NetK12_5: K12.5 R26.1 | length 205.2
  Component Side w10: R26.1@5726.47,9962.95 R26.1@5732.38,9962.95
  Component Side w20: K12.5 5690.34,9926.83 R26.1@5726.47,9962.95
NetK12_7: K12.7 R25.1 | length 198.4
  Component Side w20: K12.7 5688.55,10100.05 R25.1@5725.32,10063.28
NetK13_3: K13.3 K13.6 | length 234
  Component Side w10: K13.6 K13.3@2324.86,7332.04
NetK14_2: K14.2 K15.5 K15.7 | length 550.1
  Component Side w10: K14.2 K15.7 K15.7@2093.6,7672.17 ; 1981.23,7672.26 1981.23,7815.41 2011.22,7845.4 K15.5
NetK14_3: K14.3 K14.6 | length 226.6
  Component Side w10: K14.6@1562.72,7758.28 K14.3@1789.37,7758.28
NetK15_2: K15.2 U2.2 | length 1833.3
  Component Side w10: U2.2 v1@2473.28,8518.21 ; K15.2@2345.37,7671.81 v1@2474.32,7671.81
  Bottom Layer w10: v1(2473.86,7671.46) v1@2473.86,8516.93
  other v1: 2473.27,8517.68
NetK15_3: K15.3 K15.6 | length 233
  Component Side w10: K15.6 K15.3@2325.08,7758.78
NetK16_3: K16.3 K16.6 | length 237.8
  Component Side w10: K16.3 K16.3@1809.51,10684.43
  Component Side w50: K16.6 K16.3
NetK16_4: K16.4 U4.3 | length 959.3
  Component Side w10: K16.4 1833.99,10771.05 1949.87,10886.93 v1@2415.24,10886.93 ; U4.3 v1@2417.3,10672.81
  Bottom Layer w10: v1@2416.54,10671.61 v1(2416.54,10885.85)
  other v1: 2418.87,10673.35
NetK16_5: K16.5 K16.7 WE.1 | length 1439.5
  Component Side w10: 1435.36,10598.72 1435.36,10739.68 1466.73,10771.05 K16.5
  Component Side w50: WE.1@723.17,10121.28 853.03,10121.28 921.32,10189.57 921.32,10365.7 1152.5,10596.87 ; 1151.98,10597.82 K16.7
NetK17_3: K17.3 K17.6 | length 231
  Component Side w10: K17.6 K17.3@2321.83,10259.64
NetK17_4: K17.4 K18.5 K18.7 | length 1105.3
  Component Side w10: K18.7@1575.54,10166.78 1500.15,10166.78 1475.02,10191.91 1475.02,10309.02 1505.92,10339.92 K18.5 1683.65,10339.92 1724.2,10380.46 2201.29,10380.46 2234.63,10347.13 K17.4@2308.86,10347.13
NetK17_5: K17.5 K17.7 U4.7 | length 721.6
  Component Side w10: v1@2007.12,10346.26 K17.5 ; v1@2007.78,10169.49 K17.7@2070,10169.49 ; v1(2007.95,10624.62) 2003.8,10624.62 2002.9,10623.72 U4.7@2118.58,10623.72
  Bottom Layer w10: v1@2007.25,10170.36 2007.25,10623.92 v1(2007.95,10624.62)
  other v1: 2006.79,10170.03 2007.45,10345.31
NetK18_2: K18.2 U22.2 | length 1089.6
  Component Side w10: U22.2@1613.46,9471.7 U22.2@1639.45,9471.7 ; U22.2 v1@1887.76,9472.71 ; K18.2@1779.77,10166.69 K18.2 v1@1878.59,10166.69
  Bottom Layer w10: v1@1888.3,9475.22 v1(1888.3,10165.99)
  other v1: 1889.73,9472.07
NetK18_3: K18.3 K18.6 | length 225.8
  Component Side w10: K18.6 K18.3@1796.24,10253.31
NetK19_2: K19.2 K19.4 SIG_OUT_A.1 | length 1196.4
  Component Side w10: v1@5229.12,9101.87 K19.4@5300.86,9101.87 ; v1@5231.03,9275.98 K19.2@5300.77,9275.98
  Component Side w20: K19.2 5381.11,9276.61 5439.03,9334.53 5621.21,9334.53 5710.91,9244.83 6011.09,9244.83 ; 6011.09,9244.36 SIG_OUT_A.1
  Bottom Layer w10: v1@5230.14,9101.42 v1@5230.14,9277.77
  other v1: 5229.82,9101.18 5230.38,9275.61
NetK19_3: K19.3 K19.6 | length 230.6
  Component Side w10: K19.3@5311.78,9191.39 K19.6@5542.36,9191.39
NetK20_2: K20.2 K20.4 SIG_OUT_B.1 | length 1198.1
  Component Side w10: v1@5226.29,8253.27 K20.4 ; v1@5227.03,8426.5 K20.2
  Component Side w20: K20.2@5314.74,8426.33 5409.19,8426.33 5466.47,8483.62 5689.87,8483.62 5726.88,8446.61 SIG_OUT_B.1
  Bottom Layer w10: v1@5226.95,8249.88 v1@5226.95,8427.65
  other v1: 5226.5,8252.52 5226.13,8425.64
NetK20_3: K20.3 K20.6 | length 236.2
  Component Side w10: K20.3@5313.29,8340.44 K20.6@5549.51,8340.44
NetK20_5: K20.5 R22.1 U5.1 | length 5217.5
  Component Side w10: v1(3559.41,6961.92) 3561.51,6959.83 4063.28,6959.83 4137.13,7033.68 U5.1@4137.13,7128.91 ; v1(3560.36,6595.53) v1@5716.03,6595.53 ; U5.1 4172.1,7129.28 4240.09,7061.3 R22.1@4277.79,7061.3 ; K20.5 v1@5714.36,8253.27
  Bottom Layer w10: v1@3560.26,6594.96 v1@3560.26,6959.83 ; v1@5716.91,6595.77 v1(5716.91,8253.99)
  other v1: 5716.3,6595.18
NetK20_7: K20.7 U5.6 U5.7 | length 4465.7
  Component Side w10: v1@3728.49,7179.68 U5.7 ; v1(3729.29,6712.51) v1@5669.5,6712.51 ; U5.7@3920.45,7183.18 U5.6 ; K20.7@5561.49,8428.59 v1@5667.16,8428.59
  Bottom Layer w10: v1@3729.24,6713.3 v1(3729.24,7178.64) ; v1@5669.71,6713.18 v1(5669.71,8428.78)
  other v1: 5669.2,6711.94
NetR3_1: R3.1 U2.4 | length 585.5
  Component Side w40: R3.1@1027.53,8385.12 U2.4@1613.07,8385.12
NetR18_2: R18.2 U22.1 | length 109.1
  Component Side w10: U22.1 R18.2@1613.75,9648.75
NetR19_2: R19.2 R20.2 U5.3 | length 248.2
  Component Side w10: U5.3 4176.19,7230.07 4211.82,7265.71 R19.2@4279.6,7265.71 ; R19.2@4276.76,7275.91 R20.2
NetR21_1: R21.1 R22.2 U5.2 | length 273.8
  Component Side w10: U5.2 4172.09,7179.68 4194.79,7156.98 R21.1@4275.88,7156.98 ; R21.1@4277.42,7156.98 R21.1@4275.88,7156.98 ; R22.2@4357.16,7066.73 4275.88,7148.02 R21.1@4275.88,7156.98
NetR24_1: R24.1 SIG_IN.1 | length 162.9
  Component Side w10: R24.1 R24.1@5933.53,10054.12
  Component Side w30: R24.1 SIG_IN.1@6096.06,10054.28
NetR24_2: R24.2 R25.2 R26.2 U3.2 | length 7837.5
  Component Side w10: U3.2 v1@1873.3,7231.05 ; v1(1873.21,6782.64) v1@5567.06,6782.64 ; v1(5569.39,9860.83) 5789.59,9860.83 5817.98,9889.23 5817.98,9936.29 ; R26.2@5817.01,9962.06 5817.53,9961.54 5817.53,9936.29
  Component Side w30: R26.2 R25.2@5820.42,10066.67 ; R26.2@5834.18,9964.28 R24.2
  Bottom Layer w10: v1@1873.15,6782.3 v1(1873.15,7230.68) ; v1(5568.39,6781.65) v1@5568.39,9864.42
NetR27_2: R27.2 U2.1 | length 111.3
  Component Side w10: U2.1@1615.64,8595.58 R27.2
NetR30_1: R30.1 U22.4 | length 794.5
  Component Side w40: U22.4 R30.1@2408.25,9338.85
OUT_SIMV: K13.7 K19.5 R21.2 U3.6 U3.7 | length 7811.7
  Component Side w10: v1(1368.18,6928.09) v1@2000.78,6928.09 ; v1@1371.12,7231.05 U3.7 U3.6@1581.17,7279.72 ; v1@2001.5,6928.29 4386.99,6928.29 ; v1@2006.73,7245.43 K13.7 ; R21.2 4431.57,7159.69 4465.22,7126.03 4465.22,7006.52 4386.99,6928.29 ; K19.5 v1@5626.29,9103.38 ; v1@5624.63,6928.29 4386.99,6928.29
  Bottom Layer w10: v1@1368.23,6930.75 v1(1368.23,7231.92) ; v1@2000.92,6933.41 v1(2000.92,7245.01) ; v1@5625.53,6928.23 v1(5625.53,9102.37)
  other v1: 2002.08,6927.68 5624.94,6928.16
RE: RE.1 U3.5 | length 867.4
  Component Side w20: RE.1@716.09,7332.09 U3.5@1583.49,7332.09
RELAY_CTRL1: DIO1.8 T1.1 | length 2765.8
  Component Side w10: T1.1 v1@3782.34,7081.09 ; v1(3782.73,7348.08) 3927.25,7492.6 4603.35,7492.6 4825.97,7269.98 DIO1.8@5891.91,7269.98
  Bottom Layer w10: v1@3782.82,7347.69 3783.47,7347.05 v1(3783.47,7080.71)
RELAY_CTRL2: DIO1.7 T2.1 | length 2594.1
  Component Side w10: T2.1 3806.01,7423.2 3912.37,7529.56 4611.41,7529.56 4818.97,7321.99 5939.58,7321.99 DIO1.7@5988.75,7272.82
RELAY_CTRL3: DIO1.10 T3.1 | length 2745.4
  Component Side w10: T3.1@3538.48,7765.72 v1@4845.6,7765.72 ; v1@4846.31,7372 DIO1.10@5891.69,7372
  Bottom Layer w10: v1@4846.72,7371.73 v1(4846.72,7764.6)
  other v1: 4846.59,7371.84
RELAY_CTRL4: DIO1.9 T4.1 | length 3150.9
  Component Side w10: T4.1 v1@4806.1,8107.19 ; v1@4805.53,7421.09 5942.59,7421.09 DIO1.9@5991.69,7372
  Bottom Layer w10: v1@4805.08,7421.36 v1(4805.08,8106.98)
  other v1: 4804.32,7421.29
RELAY_CTRL5: DIO1.12 T5.1 | length 3322.1
  Component Side w10: T5.1 v1@4775.44,8449.22 ; v1@4768.11,7472 DIO1.12@5891.69,7472
  Bottom Layer w10: v1@4767.32,7477.89 v1(4767.32,8448.19)
  other v1: 4767.98,7472.53
RELAY_CTRL6: DIO1.11 T6.1 | length 3734.2
  Component Side w10: T6.1 v1@4730.22,8790.47 ; v1@4730.4,7521.29 5942.39,7521.29 DIO1.11@5991.69,7472
  Bottom Layer w10: v1@4731.29,7520.85 v1(4731.29,8790.27)
  other v1: 4730.19,7520.87
RELAY_CTRL7: DIO1.14 T7.1 | length 3908.9
  Component Side w10: T7.1 v1@4414.05,9132.53 ; v1@4410.7,7572 DIO1.14@5891.69,7572
  Bottom Layer w10: v1@4410.57,7571.64 v1(4410.57,9132.88)
  other v1: 4409.18,7571.14
RELAY_CTRL8: DIO1.13 T8.1 | length 4318.9
  Component Side w10: T8.1 v1@4495.65,9474.27 ; v1@4495.99,7619.81 5943.88,7619.81 DIO1.13@5991.69,7572
  Bottom Layer w10: v1@4495.75,7618.79 v1(4495.75,9474.25)
  other v1: 4496.06,7618.74
RELAY_CTRL9: DIO1.16 T9.1 | length 4489.1
  Component Side w10: T9.1 v1@4537.95,9816.56 ; v1@4536.89,7672 DIO1.16@5891.69,7672
  Bottom Layer w10: v1@4536.67,7672.38 v1(4536.67,9816.69)
  other v1: 4536.83,7671.12
RELAY_CTRL10: DIO1.15 T10.1 | length 4897.8
  Component Side w10: T10.1 v1@4574.37,10158.31 ; v1@4577.13,7720.71 5942.97,7720.71 DIO1.15@5991.69,7672
  Bottom Layer w10: v1@4576.51,7720.64 v1(4576.51,10157.23)
  other v1: 4576.01,7720.16
RELAY_CTRL11: DIO1.18 T11.1 | length 3121.2
  Component Side w10: v1@5177.43,10127.8 T11.1 ; v1@5181.47,7772 DIO1.18@5891.69,7772
  Bottom Layer w10: v1@5178.54,7775.79 v1(5178.54,10126.86)
  other v1: 5178.41,7771.4
RELAY_CTRL12: DIO1.17 T12.1 | length 2635.1
  Component Side w10: T12.1@5703.13,10187.53 v1(5762.42,10187.53)
  Bottom Layer w10: v1(5762.42,10187.53) 5762.42,7878.83 5819.07,7822.18 5940.5,7822.18 DIO1.17@5986.85,7775.83
RELAY_CTRL13: DIO1.2 T13.1 | length 4851.6
  Component Side w10: v1(1828.34,6822.65) v1@4640.91,6822.65 ; T13.1 v1@1912.76,7283.19 ; v1@4648.6,6971.47 DIO1.2
  Bottom Layer w10: v1@1829.21,6828.16 1829.21,7254.39 1857.19,7282.37 v1(1912.65,7282.37) ; v1(4648.89,6822.61) v1@4648.89,6971.26
  other v1: 4648.46,6971.82
RELAY_CTRL14: DIO1.4 T14.1 | length 5528.7
  Component Side w10: v1@1316.55,7584.25 T14.1 ; v1(1323.3,6891.03) v1@4558.73,6891.03 ; v1@4556.89,7071.47 DIO1.4
  Bottom Layer w10: v1@1322.45,6890.57 v1(1322.45,7585.37) ; v1(4556.63,6892.67) v1@4556.63,7071.95
  other v1: 4556.51,7070.92
RELAY_CTRL15: DIO1.1 T15.1 | length 5243.1
  Component Side w10: v1(1787.97,6859.36) v1@4598.81,6859.36 ; v1@1881.56,7624.5 T15.1 T15.1@1916.2,7584.01 ; v1@4607.61,7020.96 5942.77,7020.96 DIO1.1
  Bottom Layer w10: v1@1788.93,6861.23 1788.93,7537.99 v1(1878.43,7627.49) ; v1(4607.31,6860.03) v1@4607.31,7020.64
  other v1: 4607.23,7021.07
RELAY_CTRL16: DIO1.5 T16.1 | length 9539.1
  Component Side w10: v1(1260.88,9804.82) v1@2563.88,9804.82 ; v1@1262.42,10508.52 T16.1@1381.62,10508.52 ; v1(2566.71,10498.37) v1@4698.94,10498.37 ; v1@4694.65,7224.78 5938.9,7224.78 DIO1.5@5991.69,7172
  Bottom Layer w10: v1@1261.22,9807.7 v1(1261.22,10508.73) ; v1(2565.4,9804.8) v1@2565.4,10496.72 ; v1@4693.39,7226.97 v1(4693.39,10499.75)
  other v1: 4694.2,7227.26
RELAY_CTRL17: DIO1.3 T17.1 | length 8571
  Component Side w10: T17.1 1956.56,10118.75 v1@2045.2,10118.75 ; v1(2045,9871.71) v1@2486.14,9871.71 ; v1(2484.19,10611.16) v1@4608.87,10611.16 ; v1@4614.36,7121.43 5942.26,7121.43 DIO1.3@5991.69,7072
  Bottom Layer w10: v1@2044.22,9876.21 v1(2044.22,10118.33) ; v1(2484.95,9872.74) v1@2484.95,10612.71 ; v1@4614.26,7121.62 v1(4614.26,10611.67)
  other v1: 4614.37,7121.86
RELAY_CTRL18: DIO1.6 T18.1 | length 8979.9
  Component Side w10: v1(1294.67,9838.63) v1@2520.78,9838.63 ; v1@1302.85,10077.89 T18.1 ; v1(2525.75,10539.06) v1@4648.26,10539.06 ; v1@4656.35,7172 DIO1.6@5891.69,7172
  Bottom Layer w10: v1@1294.67,9839.95 v1(1294.67,10077.69) ; v1(2524.97,9838.39) v1@2524.97,10536.31 ; v1@4650.29,7171.61 v1(4650.29,10538.39)
  other v1: 4649.94,7173.05
RELAY_CTRL19: DIO1.20 T19.1 | length 1599.8
  Component Side w10: T19.1 v1@5818.88,9365.94
  Bottom Layer w10: v1(5811.82,9366.24) 5811.82,7956.1 DIO1.20@5893.96,7873.97
RELAY_CTRL20: DIO1.19 T20.1 | length 777.3
  Component Side w10: T20.1 v1@5849.97,8514.26
  Bottom Layer w10: v1(5851.3,8512.89) 5851.3,8018.89 DIO1.19@5993.19,7877
V_TRANS: K14.4 K18.4 | length 2705.8
  Component Side w10: K18.4 v1@1894.99,10339.92 ; K14.4 v1@1896.12,7845.4
  Bottom Layer w10: v1(1894.11,10339.22) 1848.81,10293.92 1848.81,7901.24 v1@1901.58,7848.47
  other v1: 1900.98,7846.01
V_TRANS2: K15.4 K17.2 | length 2511.5
  Component Side w10: K17.2 v1@2418.86,10173.03 ; K15.4 v1@2421.32,7845.4
  Bottom Layer w10: v1@2424.44,7846.08 v1(2424.44,10172.76)
  other v1: 2425.53,7844.59
WE_FOLLOW: R19.1 U4.1 U4.2 | length 5577.2
  Component Side w10: U4.1 v1@4452.94,10572.02 ; U4.1@2327.58,10573.85 U4.2 ; R19.1 v1@4451.48,7262.69
  Bottom Layer w10: v1(4452.35,7254.54) v1@4452.35,10572.51
  other v1: 4450.59,10573.21
pads on no net: K1.2 K1.7 K2.2 K2.7 K3.2 K3.7 K4.2 K4.7 K5.2 K5.7 K6.2 K6.7 K7.2 K7.7 K8.2 K8.7 K9.2 K9.7 K10.2 K10.7 K11.2 K11.7 K13.4 K13.5

## Polygon pours and split planes (outlines as drawn)
AGND on Component Side "Top Side-AGND" (solid, remove dead copper, pour order 0): 575.06,11907.27 575.08,11907.25 575.08,6236.97 6256.53,6236.97 6256.57,6237.02 6256.82,6237.26 6256.82,11925.06 575.09,11925.06 575.06,11925.08
AGND on Bottom Layer "Bot Side-AGND" (solid, remove dead copper, pour order 2): 575.06,11907.27 575.08,11907.25 575.08,6236.97 6256.53,6236.97 6256.57,6237.02 6256.82,6237.26 6256.82,11925.06 575.09,11925.06 575.06,11925.08

## Silkscreen, mask and mechanical layers (free items; w line width, h text height)
Top Overlay:
  text "SINOAGG TECH" at 2627.69,11566.75 h300
  text "ECS_V1.06 20170826" at 2646.11,11413.26 h60
Top Solder:
  lines w150: 575.31,6238.6 574.31,11928.6 6256.67,11928.6 ; 586.31,6238.6 6258.1,6238.6
Mechanical 1:
  lines w10: 575.03,6239.06 6256.54,6239.06 6256.54,11907.48 575.03,11907.48 575.03,6239.06

## Dimensions
6346.78,6237.34 to 6256.67,11928.6 on Top Overlay
571.74,5765.39 to 6257.21,5753.85 on Top Overlay

## Text inside footprints (layer, text, board x,y; h text height)
DIO1: Top Overlay "20" at 5912.27,7931.47 h50 r90; Top Overlay "19" at 6012.27,7931.47 h50 r90; Top Overlay "1" at 6012.27,6871.47 h50 r90; Top Overlay "2" at 5912.27,6871.47 h50 r90
PWR_15V: Top Overlay "-" at 5827.11,10702.79 h118.11; Top Overlay "+" at 5907.11,11216.79 h118.11 r180